# EAGLE board sensor_Dio Faziko Pratama(Line Follower) (EAGLE 9.6.2)
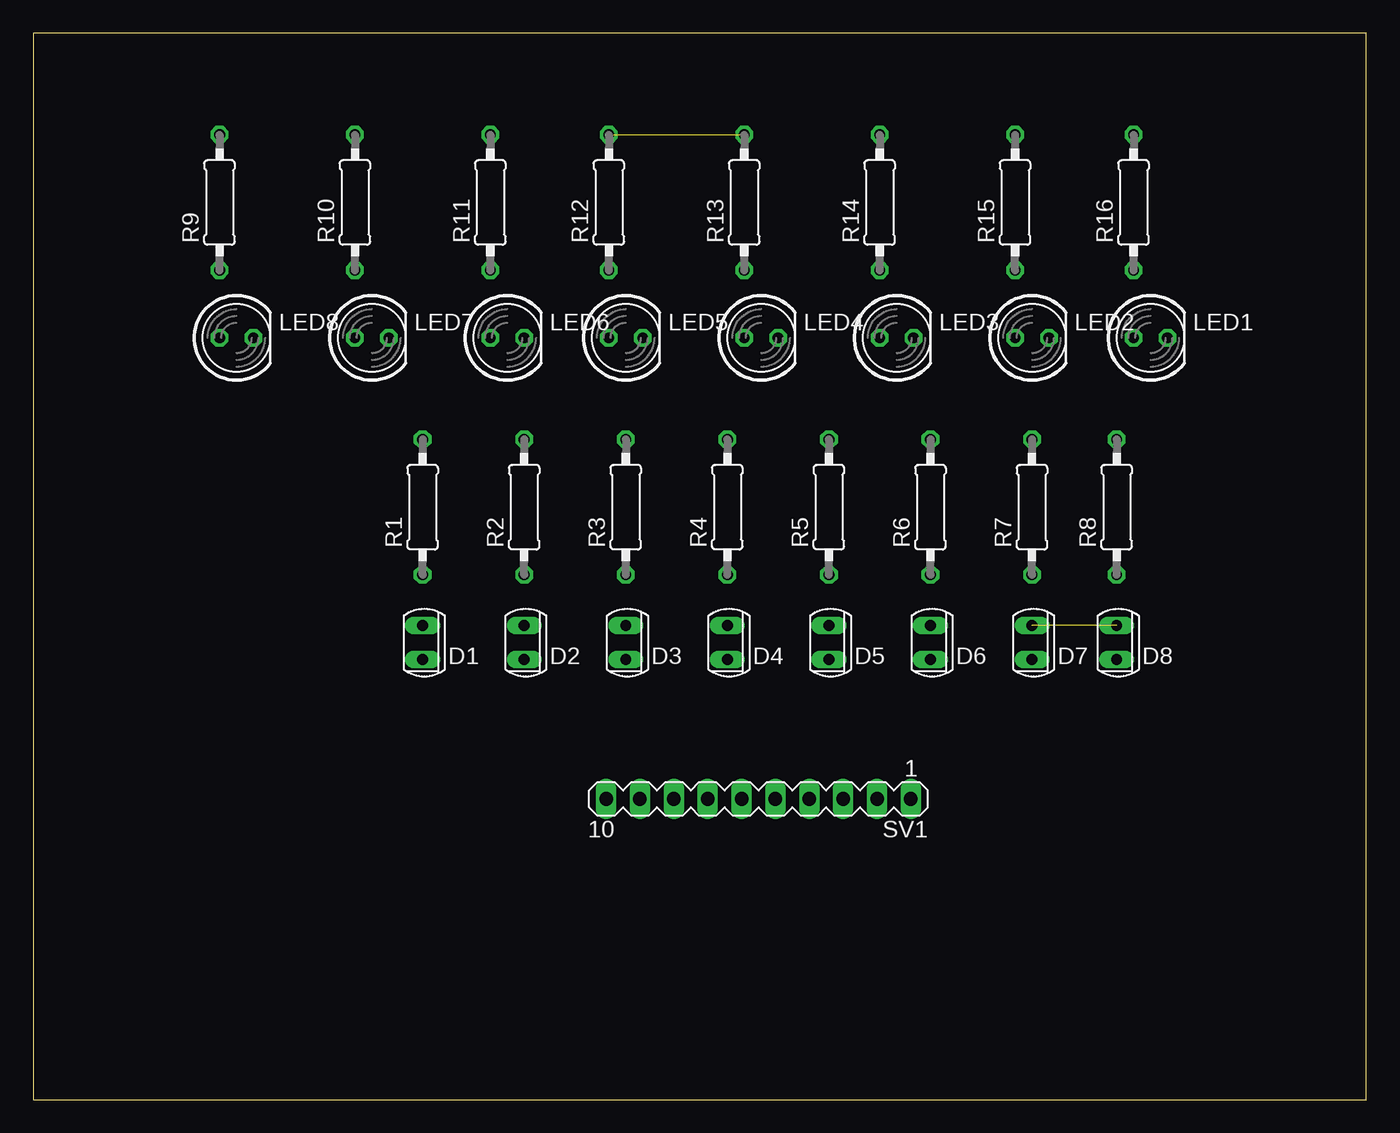
[diagram p0: board, top side]
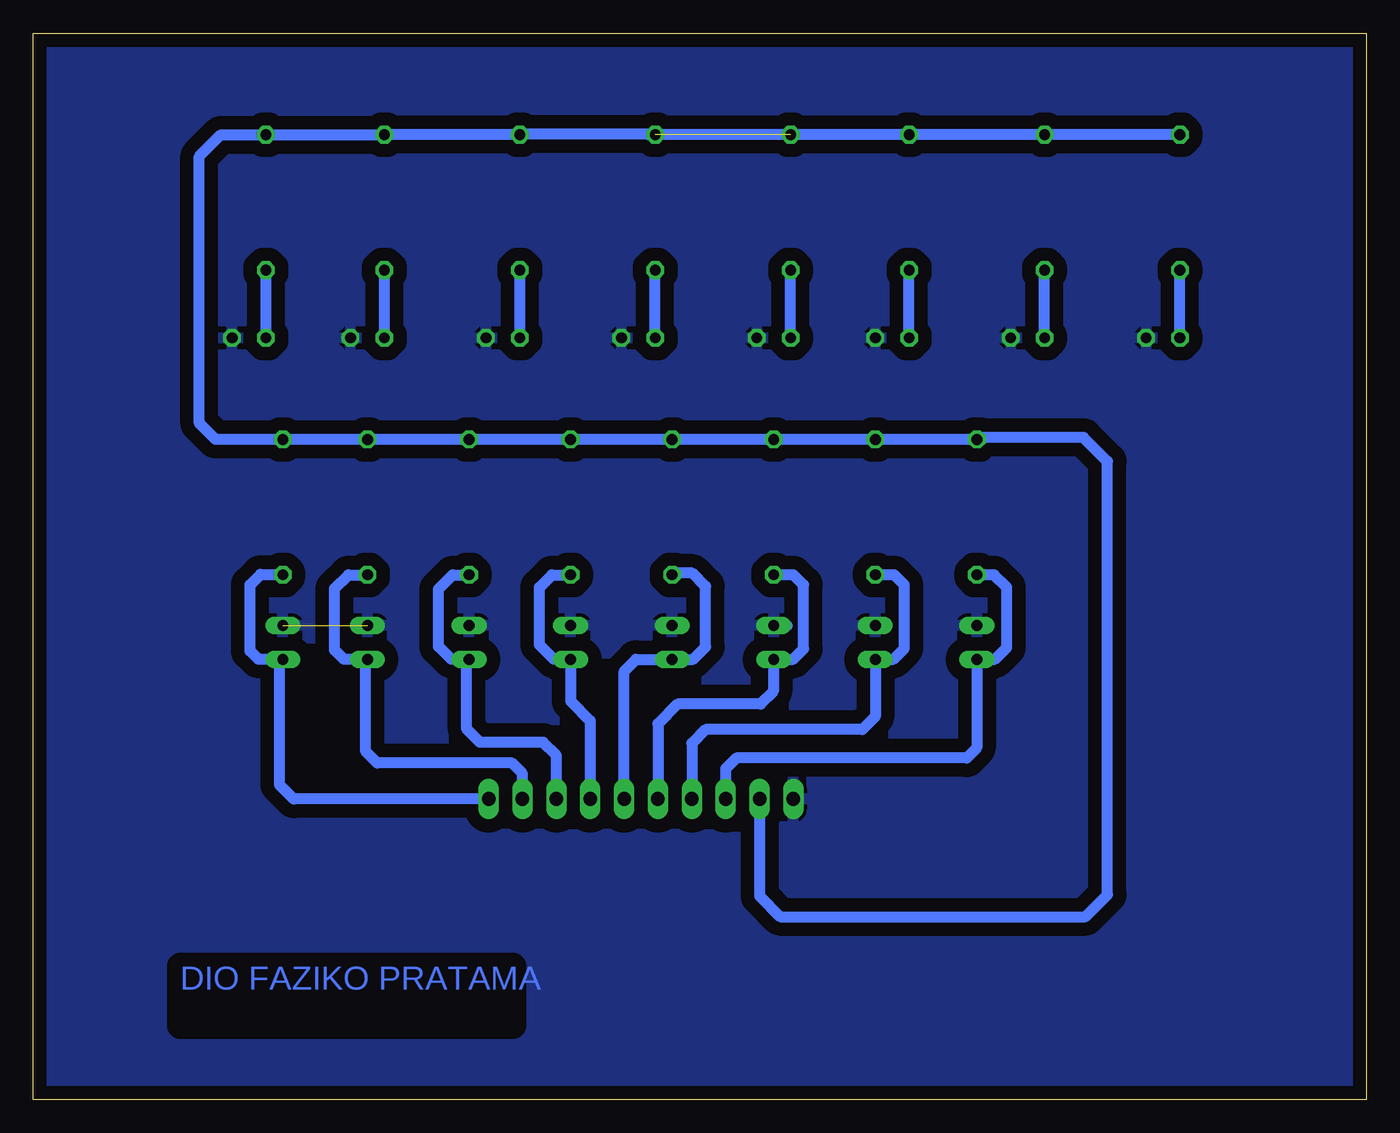
[diagram p1: board, bottom side, seen from below]

Size 100 x 80 mm. Coordinates in mm from the lower left corner, seen from the top.
Outline: 0,0 100,0 100,80 0,80 0,0
Copper layers (1*16): Top 0.035mm / dielectric 1.5mm / Bottom 0.035mm
Design rules "default": minimum track width 6mil, minimum drill 0.35mm, track to track 6mil, track to pad 6mil, pad to pad 6mil, via to via 6mil, smd to smd 6mil, copper to edge 40mil, drill to drill 6mil, minimum pad ring 10mil, minimum via ring 8mil, stop-mask expansion 4mil, vias tented up to drill 0mil, thermal gap 10mil

## Footprints (pad centres in the part's own frame; a part is rotated, then mirrored left to right if it is on the bottom)
SFH225 = drill 0.813 long: A 0,1.27; K 0,-1.27
LED5MM = drill 0.813 octagon: A -1.27,0; K 1.27,0
0207/10 = drill 0.813 octagon: 1 -5.08,0; 2 5.08,0
MA10-1 = drill 1.016 long: 1 -11.43,0; 2 -8.89,0; 3 -6.35,0; 4 -3.81,0; 5 -1.27,0; 6 1.27,0; 7 3.81,0; 8 6.35,0; 9 8.89,0; 10 11.43,0

## Placement (x,y rotation side)
D1  PhotoDioda  [SFH225]  29.21,34.29 0 top
D2  PhotoDioda  [SFH225]  36.83,34.29 0 top
D3  PhotoDioda  [SFH225]  44.45,34.29 0 top
D4  PhotoDioda  [SFH225]  52.07,34.29 0 top
D5  PhotoDioda  [SFH225]  59.69,34.29 0 top
D6  PhotoDioda  [SFH225]  67.31,34.29 0 top
D7  PhotoDioda  [SFH225]  74.93,34.29 0 top
D8  PhotoDioda  [SFH225]  81.28,34.29 0 top
LED1  LED putih SB  [LED5MM]  83.82,57.15 0 top
LED2  LED putih SB  [LED5MM]  74.93,57.15 0 top
LED3  LED putih SB  [LED5MM]  64.77,57.15 0 top
LED4  LED putih SB  [LED5MM]  54.61,57.15 0 top
LED5  LED putih SB  [LED5MM]  44.45,57.15 0 top
LED6  LED putih SB  [LED5MM]  35.56,57.15 0 top
LED7  LED putih SB  [LED5MM]  25.4,57.15 0 top
LED8  LED putih SB  [LED5MM]  15.24,57.15 0 top
R1  [0207/10]  29.21,44.45 90 top
R2  [0207/10]  36.83,44.45 90 top
R3  [0207/10]  44.45,44.45 90 top
R4  [0207/10]  52.07,44.45 90 top
R5  [0207/10]  59.69,44.45 90 top
R6  [0207/10]  67.31,44.45 90 top
R7  [0207/10]  74.93,44.45 90 top
R8  [0207/10]  81.28,44.45 90 top
R9  330  [0207/10]  13.97,67.31 90 top
R10  330  [0207/10]  24.13,67.31 90 top
R11  330  [0207/10]  34.29,67.31 90 top
R12  330  [0207/10]  43.18,67.31 90 top
R13  330  [0207/10]  53.34,67.31 90 top
R14  330  [0207/10]  63.5,67.31 90 top
R15  330  [0207/10]  73.66,67.31 90 top
R16  330  [0207/10]  82.55,67.31 90 top
SV1  [MA10-1]  54.41,22.56 180 top

## Library data of the parts
D1-D8 = opto-trans-siemens
LED1-LED8 = led
R1-R16 = resistor
SV1 = con-lstb

## Nets
GND: D1.A D2.A D3.A D4.A D5.A D6.A D7.A D8.A LED1.K LED2.K LED3.K LED4.K LED5.K LED6.K LED7.K LED8.K SV1.10
N$1: LED7.A R10.1
N$2: D7.K R7.1 SV1.2
N$3: D8.K R8.1 SV1.1
N$4: D1.K R1.1 SV1.8
N$5: D2.K R2.1 SV1.7
N$6: D3.K R3.1 SV1.6
N$7: D5.K R5.1 SV1.4
N$8: D4.K R4.1 SV1.5
N$9: D6.K R6.1 SV1.3
N$10: LED6.A R11.1
N$11: LED5.A R12.1
N$12: LED4.A R13.1
N$13: LED3.A R14.1
N$14: LED2.A R15.1
N$15: LED1.A R16.1
N$16: LED8.A R9.1
VCC: R1.2 R2.2 R3.2 R4.2 R5.2 R6.2 R7.2 R8.2 R9.2 R10.2 R11.2 R12.2 R13.2 R14.2 R15.2 R16.2 SV1.9

## Tracks (layer width: path | path; a pad name or v marks a point on that pad's centre or on a via)
GND  (1 unrouted)
  Bottom 0.813: D3.A 43.43,35.56
  pour Bottom (isolate 1.016): 0.3,79.63 0.3,0.46 99.82,0.46 99.82,79.65 0.28,79.65
N$1
  Bottom 0.813: LED7.A R10.1
N$2
  Bottom 0.813: SV1.2 63.3,24.46 64.08,25.25 74.19,25.25 75.06,26.11 75.06,32.89 D7.K 76.68,33.02 77.39,33.73 77.39,38.33 76.35,39.37 R7.1
N$3
  Bottom 0.813: SV1.1 80.47,22.55 81.53,23.62 81.53,32.77 D8.K 83.11,33.02 83.74,33.66 83.74,38.61 82.96,39.4 81.31,39.4 R8.1
N$4
  Bottom 0.813: SV1.8 48.06,24.82 47.24,25.63 29.97,25.63 29.21,26.39 D1.K 27.86,33.02 26.98,33.91 26.98,38.43 27.91,39.37 R1.1
N$5
  Bottom 0.813: SV1.7 50.6,26.72 49.55,27.76 37.8,27.76 36.83,28.73 D2.K 35.48,33.02 34.65,33.86 34.65,38.61 35.41,39.37 R2.1
N$6
  Bottom 0.813: SV1.6 53.14,28.19 51.66,29.67 45.44,29.67 44.48,30.63 44.48,32.74 44.45,32.77 D3.K 43,33.02 42.22,33.81 42.22,38.61 42.98,39.37 R3.1
N$7
  Bottom 0.813: SV1.4 58.22,28.42 59.69,29.9 D5.K 60.94,33.02 62.03,34.11 62.03,38.43 61.09,39.37 R5.1
N$8
  Bottom 0.813: SV1.5 55.68,32.13 54.79,33.02 D4.K 50.49,33.02 49.55,33.96 49.55,38.51 50.55,39.5 51.94,39.5 R4.1
N$9
  Bottom 0.813: SV1.3 60.76,25.81 61.75,26.8 66.5,26.8 67.49,27.79 67.49,32.84 D6.K 68.63,33.02 69.6,33.98 69.6,38.3 68.53,39.37 R6.1
N$10
  Bottom 0.813: LED6.A R11.1
N$11
  Bottom 0.813: LED5.A R12.1
N$12
  Bottom 0.813: LED4.A R13.1
N$13
  Bottom 0.813: LED3.A R14.1
N$14
  Bottom 0.813: LED2.A R15.1
N$15
  Bottom 0.813: LED1.A R16.1
N$16
  Bottom 0.813: LED8.A R9.1
VCC  (1 unrouted)
  Bottom 0.813: SV1.9 45.52,15.27 43.97,13.72 21.06,13.72 19.41,15.37 19.41,47.88 21.21,49.68 29.06,49.68 R1.2 R2.2 R3.2 R4.2 R5.2 R6.2 R7.2 R8.2 86.33,49.53 87.55,50.75 87.55,70.76 85.93,72.39 R16.2 R15.2 R14.2 63.48,72.42 53.85,72.42 53.82,72.39 R12.2 R11.2 R10.2 R9.2

## Text on the board
Bottom: DIO FAZIKO PRATAMA